# Altium PCB Front panel.PcbDoc
Units mm, origin at the board's own origin, x right, y up, seen from the top; angles counter-clockwise.
Board outline 115.57 x 34.29 mm, 2 copper layers (Top Layer, Bottom Layer); 21 components, 35 nets, 144 pads, 55 vias.
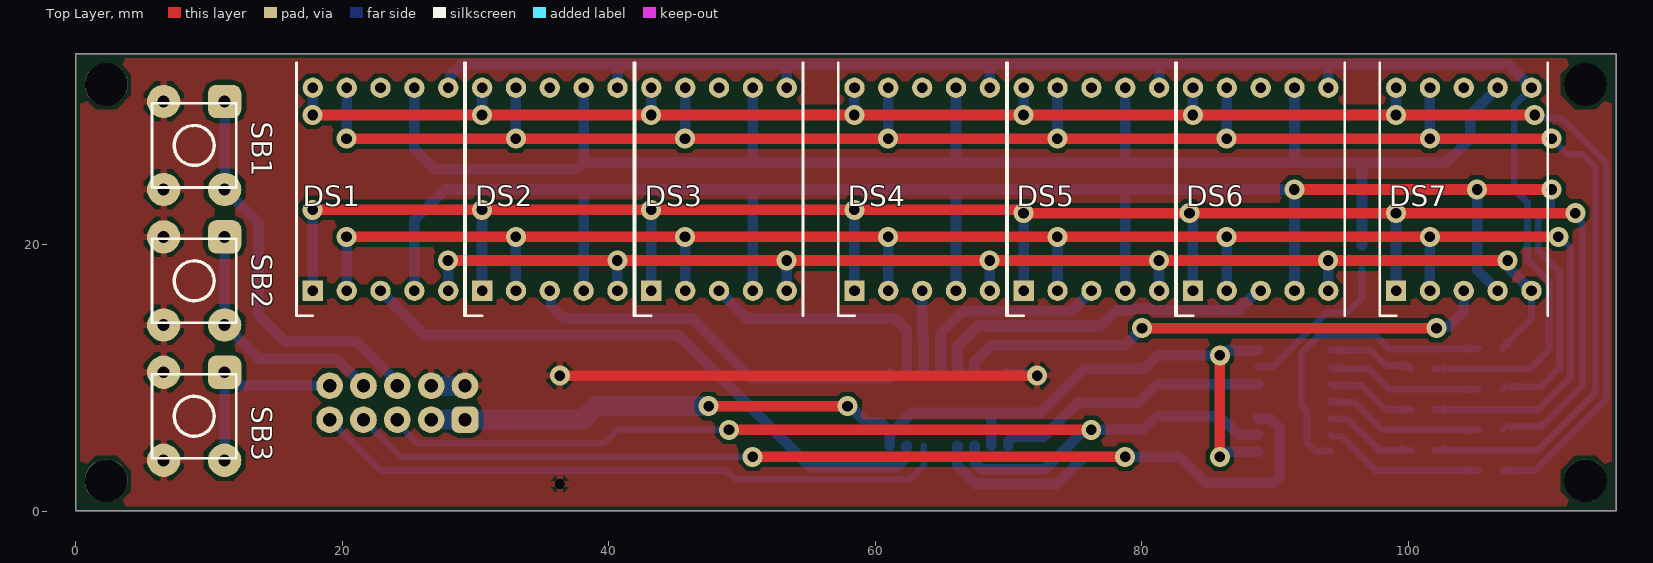
[diagram p0: Top Layer view]
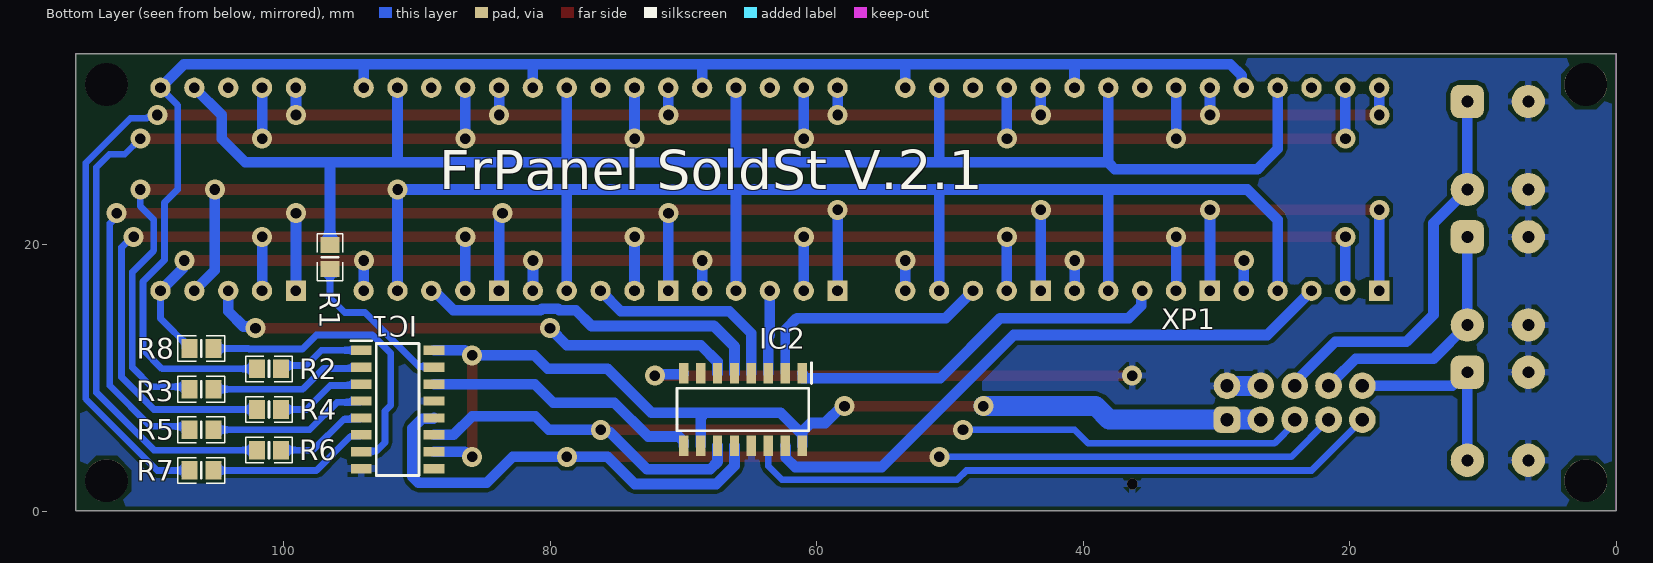
[diagram p1: Bottom Layer view, seen from below]
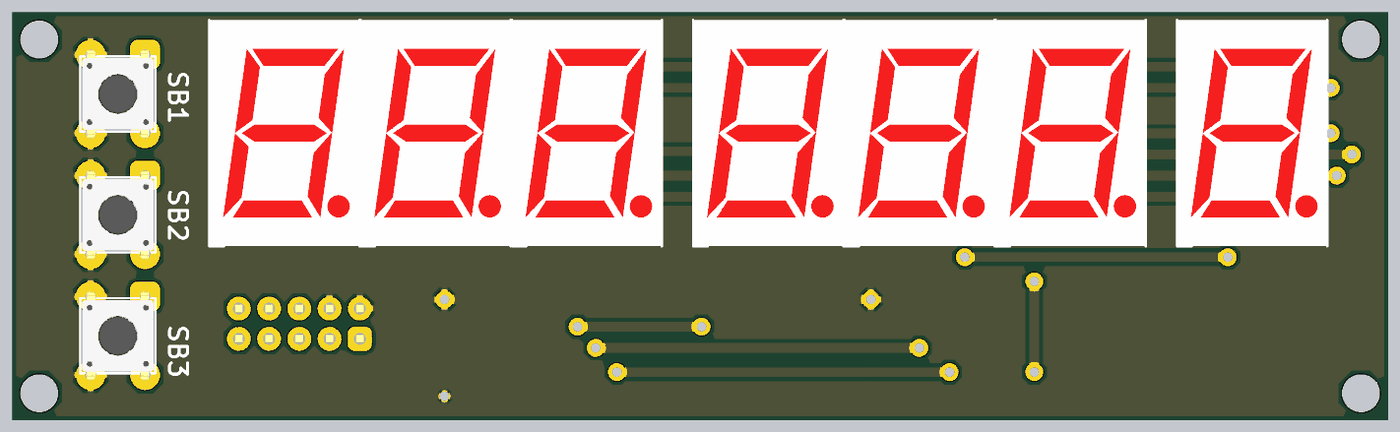
[diagram p2: 3D render of the assembled board from above, using the file's embedded part models]
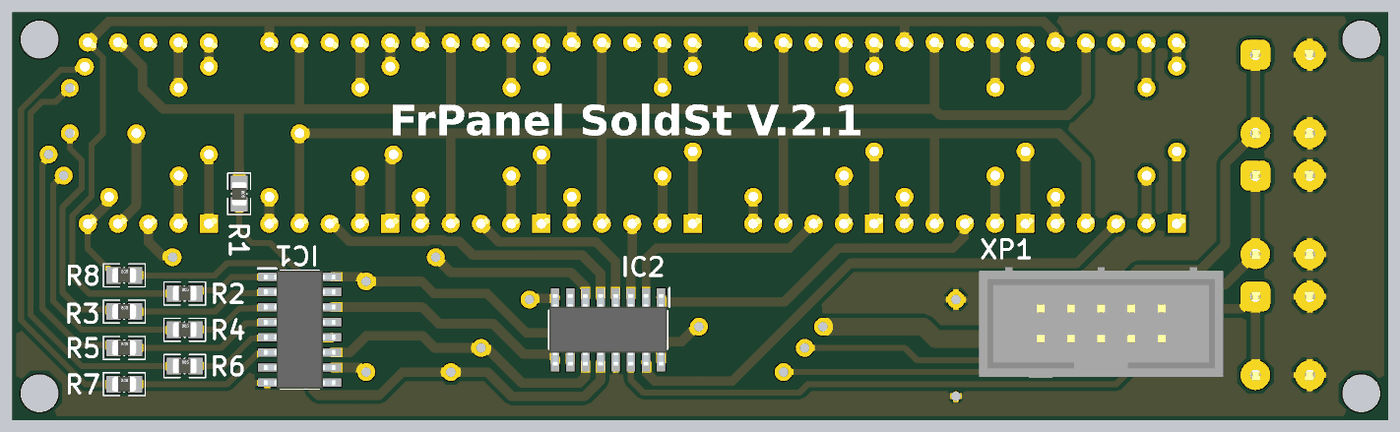
[diagram p3: 3D render of the assembled board from below, using the file's embedded part models]

## Layer stack, top to bottom
Top Solder: solder mask 0.0102, Solder Resist, Dk 3.5
Top Layer: signal copper 0.0356
Dielectric 1: dielectric 0.32, FR-4, Dk 4.8
Bottom Layer: signal copper 0.0356
Bottom Solder: solder mask 0.0102, Solder Resist, Dk 3.5

## Board outline
0.013,0.013 0.013,34.303 115.583,34.303 115.583,0.013

## Design rules (kind name [scope] priority, off if disabled: settings)
Clearance [All] p1: gap=0.3 ignorepadtopadclearanceinfootprint=FALSE
ComponentClearance [All] p1: gap=-0.025 collisioncheckmode=3 verticalgap=0.254 showdistances=FALSE
PlaneConnect [All] p1: planeconnectstyle=Relief reliefexpansion=0.508 reliefentries=4 reliefconductorwidth=0.5 reliefairgap=0.5
PolygonConnect [All] p1: connectstyle=Relief reliefconductorwidth=0.5 reliefentries=4 polygonreliefangle="90 Angle" airgapwidth=0.254
RoutingVias [All] p1: holewidth=0.8 width=1.5 viastyle="Through Hole" minholewidth=0.5 minwidth=1 maxholewidth=1 maxwidth=2
SolderMaskExpansion [All] p1: expansion=0.102 istentingtop=FALSE
Width [All] p1: maxlimit=1.5 minlimit=0.5 preferedwidth=0.8
28 further rules are at their usual default settings.

## Components (designator, comment, footprint, x,y, rotation, side; value= is the part's Value field where it differs from the comment)
DS1 "7-Seg" DIPS1524W51P254L1260H800Q10N 17.793,16.523 r90 top
DS2 "7-Seg" DIPS1524W51P254L1260H800Q10N 30.493,16.523 r90 top
DS3 "7-Seg" DIPS1524W51P254L1260H800Q10N 43.193,16.523 r90 top
DS4 "7-Seg" DIPS1524W51P254L1260H800Q10N 58.433,16.523 r90 top
DS5 "7-Seg" DIPS1524W51P254L1260H800Q10N 71.133,16.523 r90 top
DS6 "7-Seg" DIPS1524W51P254L1260H800Q10N 83.833,16.523 r90 top
DS7 "7-Seg" DIPS1524W51P254L1260H800Q10N 99.073,16.523 r90 top
IC1 "74HC595D" SOIC127P600X175-16N 91.44,7.62 r180 bottom
IC2 "74HC595D" SOIC127P600X175-16N 65.532,7.62 r270 bottom
R1 "100R" RESC2012(0805)N 96.52,19.05 r270 bottom
R2 "100R" RESC2012(0805)N 101.092,10.668 r180 bottom
R3 "100R" RESC2012(0805)N 106.172,9.144 r180 bottom
R4 "100R" RESC2012(0805)N 101.092,7.62 r180 bottom
R5 "100R" RESC2012(0805)N 106.172,6.096 r180 bottom
R6 "100R" RESC2012(0805)N 101.092,4.572 r180 bottom
R7 "100R" RESC2012(0805)N 106.172,3.048 r180 bottom
R8 "100R" RESC2012(0805)N 106.172,12.192 r180 bottom
SB1 "SW-SPST_1" B3FS_SWITCH 8.89,27.432 r270 top
SB2 "SW-SPST_1" B3FS_SWITCH 8.89,17.272 r270 top
SB3 "SW-SPST_1" B3FS_SWITCH 8.89,7.112 r270 top
XP1 "BH-10" BH-10 29.21,6.858 r180 bottom

## Footprints (in the part's own frame and the unit in brackets; to place one, negate y for a bottom-side part, rotate by r counter-clockwise, add the part's x,y. Pads: shape width x height; smd on the part's side, far side on the other; paste and mask are expansions set on the pad)
B3FS_SWITCH [mm] "SWITCH,TACTILE, PUSH BUTTON, MOMENTARY, SPST-NO, VERT, 8.5MM ACTUATOR"
  rrect50% 2.5x2.5 hole 0.9: 1(-3.302,2.286)
  round 2.5 hole 0.9: 2(3.302,2.286) 3(-3.302,-2.286) 4(3.302,-2.286)
  silkscreen extent -3.16,-3.16 3.15,3.15, body extent -3.73,-3 3.73,3, height 8.5
BH-10 [mm]
  rrect50% 2x2 hole 1: 1(0,0)
  round 2 hole 1: 2(0,2.54) 3(2.54,0) 4(2.54,2.54) 5(5.08,0) 6(5.08,2.54) 7(7.62,0) 8(7.62,2.54) 9(10.16,0) 10(10.16,2.54)
  body extent -5.17,-3.28 15.33,6.02, height 9.1
DIPS1524W51P254L1260H800Q10N [mil]
  rect 60x60 hole 31.5: 1(0,0)
  round 60 hole 31.5: 2(0,-100) 3(0,-200) 4(0,-300) 5(0,-400) 6(600,-400) 7(600,-300) 8(600,-200) 9(600,-100) 10(600,0)
  silkscreen extent -74,-448 674,48, body extent -74,-448 674,48, height 358
RESC2012(0805)N [mm] "Chip Resistor, Body 2.0x1.3mm, IPC Medium Density"
  rect 1.2x1.4 smd: 1(-0.9,0) 2(0.9,0)
  silkscreen extent -1.75,-0.97 1.75,0.97, body extent -1,-0.62 1,0.64, height 0.78
SOIC127P600X175-16N [mm]
  rect 1.55x0.7 smd: 1(-2.725,4.445) 2(-2.725,3.175) 3(-2.725,1.905) 4(-2.725,0.635) 5(-2.725,-0.635) 6(-2.725,-1.905) 7(-2.725,-3.175) 8(-2.725,-4.445) 9(2.725,-4.445) 10(2.725,-3.175) 11(2.725,-1.905) 12(2.725,-0.635) 13(2.725,0.635) 14(2.725,1.905) 15(2.725,3.175) 16(2.725,4.445)
  silkscreen extent -3.5,-4.95 1.6,5.15, body extent -3,-4.95 3,4.95, height 1.75

## Part data
DS1 DS2 DS3 DS4 DS5 DS6 DS7: "Display", Manufacturer_Name=Sunrom, Manufacturer_Part_Number=4258, Datasheet Link=https://www.sunrom.com/get/328636, Height=8mm
IC1 IC2: "Integrated Circuit", Manufacturer_Name=NXP, Mouser Part Number=N/A, Datasheet Link=https://assets.nexperia.com/documents/data-sheet/74HC_HCT595.pdf, Height=1.75mm, Manufacturer_Part_Number=74HC595D, Mouser Price/Stock=https://www.mouser.co.uk/ProductDetail/NXP-Semiconductors/74HC595D?qs=KBAwV6Cvgt0f%252BALigJeNTw%3D%3D
R1 R2 R3 R4 R5 R6 R7 R8: library part RESC2012(0805), Package=0805, Part Number=RESC2012(0805)
XP1: library part 302-S101, "Connector Header Through Hole 10 position 0.100\" (2.54mm)", Digi-Key Part Number=ED1543-ND, Package="Header 10POS 2.54mm", HelpURL=https://www.digikey.com/product-detail/en/on-shore-technology-inc/302-S101/ED1543-ND/2178422, Manufacturer Part Number=302-S101, Part Number=302-S101, Price$=0.13125
SB1 SB2 SB3: Part Number=SW-SPST_1

## Free pads (board coordinates)
  round 3.2 hole 3.2 unplated: ""(2.286,2.286) ""(2.286,32.004) ""(113.284,2.286) ""(113.284,32.004)

## Via types
v1: diameter 1.5, hole 0.8, Top Layer to Bottom Layer, 54 vias
v2: diameter 0.8, hole 0.8, Top Layer to Bottom Layer, 1 vias

## Nets (pads, with @x,y where several pads share a name; then routed paths per layer and width w, separated by ;. In a path a pad name is that pad's centre, name@x,y a point inside that pad or via, vN(x,y) a via of type N, cw(c..) or ccw(c..) an arc to the next point about the centre after c; other vN are vias at no path point)
5V: 
A: DS1.7 DS2.7 DS3.7 DS4.7 DS5.7 DS6.7 DS7.7 R1.1 | length 124.4
  Bottom Layer w0.8: DS1.7 25.4,31.75 25.4,27.178 26.416,26.162 26.924,25.654 37.631,25.654 38.1,26.123 38.1,26.162 ; DS2.7 38.113,26.175 38.1,26.162 ; DS3.7 50.813,26.175 50.8,26.162 ; DS4.7 66.053,26.175 66.04,26.162 ; DS5.7 78.74,31.75 78.74,26.162 ; DS6.7 91.453,26.175 91.44,26.162 ; R1.1 96.52,26.162 ; DS7.7 104.648,29.718 104.648,27.94 102.87,26.162 96.52,26.162 ; 38.1,26.162 50.8,26.162 ; 50.8,26.162 66.04,26.162 ; 66.04,26.162 78.74,26.162 ; 78.74,26.162 91.44,26.162 ; 91.44,26.162 96.52,26.162
B: DS1.6 DS2.6 DS3.6 DS4.6 DS5.6 DS6.6 DS7.6 R2.1 | length 122.5
  Bottom Layer w0.5: R2.1 109.113,10.668 110.545,12.1 110.545,17.217 108.928,18.834 108.928,23.152 107.95,24.13 107.95,30.459 109.233,31.742 DS7.6
  Bottom Layer w0.8: DS1.6 28.091,31.901 28.091,32.663 28.956,33.528 40.64,33.528 ; DS2.6 40.653,33.515 40.64,33.528 ; DS3.6 53.353,33.515 53.34,33.528 ; DS4.6 68.593,33.515 68.58,33.528 ; DS5.6 81.293,33.515 81.28,33.528 ; DS6.6 93.993,33.515 93.98,33.528 ; DS7.6 107.468,33.528 93.98,33.528 ; 40.64,33.528 53.34,33.528 ; 53.34,33.528 68.58,33.528 ; 68.58,33.528 81.28,33.528 ; 81.28,33.528 93.98,33.528
C: DS1.4 DS2.4 DS3.4 DS4.4 DS5.4 DS6.4 DS7.4 R3.1 | length 157.3
  Top Layer w0.8: v1(91.44,24.13) v1(105.156,24.13) v1(110.744,24.13)
  Bottom Layer w0.5: R3.1 107.251,9.323 109.907,9.323 111.345,10.761 111.345,17.941 109.728,19.558 109.728,21.844 110.744,22.86 v1(110.744,24.13)
  Bottom Layer w0.8: DS1.4 25.4,16.536 25.4,21.844 27.686,24.13 38.1,24.13 ; DS2.4 38.113,24.117 38.1,24.13 ; DS3.4 50.813,24.117 50.8,24.13 ; DS4.4 66.053,24.117 66.04,24.13 ; DS5.4 78.753,24.117 78.74,24.13 ; DS6.4 91.446,16.529 91.446,24.124 v1(91.44,24.13) 78.74,24.13 ; v1(105.156,24.13) 105.156,18.06 DS7.4 ; 38.1,24.13 50.8,24.13 ; 50.8,24.13 66.04,24.13 ; 66.04,24.13 78.74,24.13
D: DS1.2 DS2.2 DS3.2 DS4.2 DS5.2 DS6.2 DS7.2 R4.1 | length 141.5
  Top Layer w0.8: v1(20.32,20.574) v1(33.02,20.574) v1(45.72,20.574) v1(60.96,20.574) v1(73.66,20.574) v1(86.36,20.574) v1(101.6,20.574) v1(111.252,20.574)
  Bottom Layer w0.5: R4.1 109.728,7.62 112.154,10.046 112.154,19.781 111.361,20.574 v1(111.252,20.574)
  Bottom Layer w0.8: v1(20.32,20.574) 20.326,20.568 20.326,16.529 DS1.2 ; v1(33.02,20.574) 33.026,20.568 33.026,16.529 DS2.2 ; v1(45.72,20.574) 45.726,20.568 45.726,16.529 DS3.2 ; v1(60.96,20.574) 60.966,20.568 60.966,16.529 DS4.2 ; v1(73.66,20.574) 73.666,20.568 73.666,16.529 DS5.2 ; v1(86.36,20.574) 86.366,20.568 86.366,16.529 DS6.2 ; v1(101.6,20.574) 101.606,20.568 101.606,16.529 DS7.2
DIN1: IC2.14 XP1.9 | length 48.4
  Bottom Layer w0.5: XP1.9 22.86,3.048 48.768,3.048 49.464,2.352 62.609,2.352 63.627,3.37 IC2.14
DIN2: IC1.14 IC2.9 | length 20.8
  Bottom Layer w0.8: IC2.9 69.977,5.22 70.345,5.588 72.644,5.588 75.184,8.128 79.756,8.128 81.153,9.525 IC1.14
DP: DS1.5 DS2.5 DS3.5 DS4.5 DS5.5 DS6.5 DS7.5 R8.1 | length 101.4
  Top Layer w0.8: v1(27.94,18.796) v1(40.64,18.796) v1(53.34,18.796) v1(68.58,18.796) v1(81.28,18.796) v1(107.442,18.796)
  Bottom Layer w0.5: R8.1 107.072,12.292 109.233,14.453 DS7.5
  Bottom Layer w0.8: v1(27.94,18.796) 27.946,18.79 27.946,16.529 DS1.5 ; v1(40.64,18.796) 40.646,18.79 40.646,16.529 DS2.5 ; v1(53.34,18.796) 53.346,18.79 53.346,16.529 DS3.5 ; v1(68.58,18.796) 68.586,18.79 68.586,16.529 DS4.5 ; v1(81.28,18.796) 81.286,18.79 81.286,16.529 DS5.5 ; v1(93.98,18.796) 93.986,18.79 93.986,16.529 DS6.5 ; v1(107.442,18.796) 107.576,18.662 107.576,18.18 DS7.5
E: DS1.1 DS2.1 DS3.1 DS4.1 DS5.1 DS6.1 DS7.1 R5.1 | length 157.3
  Top Layer w0.8: v1(17.78,22.606) v1(30.48,22.606) v1(43.18,22.606) 70.677,22.606 70.931,22.352 v1(99.06,22.352) v1(112.522,22.352)
  Bottom Layer w0.5: R5.1 107.326,6.35 109.982,6.35 113.03,9.398 113.03,21.573 112.522,22.081 v1(112.522,22.352)
  Bottom Layer w0.8: v1(17.78,22.606) 17.786,22.6 17.786,16.529 DS1.1 ; v1(30.48,22.606) 30.486,22.6 30.486,16.529 DS2.1 ; v1(43.18,22.606) 43.186,22.6 43.186,16.529 DS3.1 ; v1(58.42,22.606) 58.426,22.6 58.426,16.529 DS4.1 ; v1(71.12,22.352) 71.126,22.346 71.126,16.529 DS5.1 ; v1(83.566,22.352) 83.566,22.163 83.826,21.902 83.826,16.529 DS6.1 ; v1(99.06,22.352) 99.066,22.346 99.066,16.529 DS7.1
F: DS1.9 DS2.9 DS3.9 DS4.9 DS5.9 DS6.9 DS7.9 R6.1 | length 152.2
  Top Layer w0.8: v1(20.32,27.94) v1(33.02,27.94) v1(45.72,27.94) v1(60.96,27.94) v1(73.66,27.94) v1(86.36,27.94) v1(101.6,27.94) v1(110.744,27.94)
  Bottom Layer w0.5: R6.1 109.728,4.572 114.046,8.89 114.046,25.793 113.068,26.771 111.913,26.771 v1(110.744,27.94)
  Bottom Layer w0.8: v1(20.32,27.94) 20.326,27.946 20.326,31.756 DS1.9 ; v1(33.02,27.94) 33.026,27.946 33.026,31.756 DS2.9 ; v1(45.72,27.94) 45.726,27.946 45.726,31.756 DS3.9 ; v1(60.96,27.94) 60.966,27.946 60.966,31.756 DS4.9 ; v1(73.66,27.94) 73.666,27.946 73.666,31.756 DS5.9 ; v1(86.36,27.94) 86.366,27.946 86.366,31.756 DS6.9 ; v1(101.6,27.94) 101.606,27.946 101.606,31.756 DS7.9
G: DS1.10 DS2.10 DS3.10 DS4.10 DS5.10 DS6.10 DS7.10 R7.1 | length 140.6
  Top Layer w0.8: v1(17.78,29.718) v1(30.48,29.718) v1(43.18,29.718) v1(58.42,29.718) v1(71.12,29.718) v1(83.82,29.718) v1(99.06,29.718) v1(109.474,29.718)
  Bottom Layer w0.5: R7.1 109.474,3.048 114.846,8.42 114.846,26.124 111.506,29.464 110.267,29.464 110.204,29.527 109.665,29.527 v1(109.474,29.718)
  Bottom Layer w0.8: v1(17.78,29.718) 17.786,29.724 17.786,31.756 DS1.10 ; v1(30.48,29.718) 30.486,29.724 30.486,31.756 DS2.10 ; v1(43.18,29.718) 43.186,29.724 43.186,31.756 DS3.10 ; v1(58.42,29.718) 58.426,29.724 58.426,31.756 DS4.10 ; v1(71.12,29.718) 71.126,29.724 71.126,31.756 DS5.10 ; v1(83.82,29.718) 83.826,29.724 83.826,31.756 DS6.10 ; v1(99.06,29.718) 99.066,29.724 99.066,31.756 DS7.10
GND: IC1.8 IC1.13 IC2.8 IC2.13 SB1.3 SB1.4 SB2.3 SB2.4 SB3.3 SB3.4 XP1.2 XP1.4 | length 40.6
  Top Layer w0.8: v1(36.322,10.16) v1(72.136,10.16)
  Bottom Layer w0.8: IC2.8 69.977,10.303 70.027,10.253 72.043,10.253 v1(72.136,10.16)
  Bottom Layer w1.5: XP1.4 XP1.2
  other v2: 36.322,2.032
NetDD1_7: 
NetDD1_8: 
NetIC1_1: IC1.1 R2.2 | length 6.6
  Bottom Layer w0.5: IC1.1 97.155,12.065 98.294,10.926 99.934,10.926 R2.2
NetIC1_2: IC1.2 R3.2 | length 11.8
  Bottom Layer w0.5: IC1.2 94.265,10.695 97.001,10.695 98.552,9.144 R3.2
NetIC1_3: IC1.3 R4.2 | length 6.8
  Bottom Layer w0.5: IC1.3 94.265,9.425 96.493,9.425 98.298,7.62 R4.2
NetIC1_4: IC1.4 R5.2 | length 12
  Bottom Layer w0.5: IC1.4 94.265,8.155 95.985,8.155 98.044,6.096 R5.2
NetIC1_5: IC1.5 R6.2 | length 7
  Bottom Layer w0.5: IC1.5 94.265,6.885 95.477,6.885 97.79,4.572 99.06,4.572 R6.2
NetIC1_6: IC1.6 R7.2 | length 12.2
  Bottom Layer w0.5: IC1.6 94.265,5.615 94.969,5.615 97.536,3.048 R7.2
NetIC1_7: IC1.7 R8.2 | length 23.3
  Bottom Layer w0.5: IC1.7 94.109,4.501 93.035,4.501 92.39,5.146 92.39,7.506 91.948,7.948 91.948,11.823 93.333,13.208 97.536,13.208 98.582,12.162 102.596,12.162 102.626,12.192 R8.2
NetIC1_15: IC1.15 R1.2 | length 12.1
  Bottom Layer w0.5: IC1.15 88.771,10.851 89.845,10.851 93.887,14.893 95.411,14.893 96.52,16.002 R1.2
NetSB1_1: SB1.1 SB1.2 XP1.6 | length 29.8
  Bottom Layer w0.8: SB1.1 SB1.2 13.716,21.59 13.716,14.732 15.748,12.7 21.082,12.7 24.13,9.652 XP1.6
NetSB2_1: SB2.1 SB2.2 XP1.8 | length 19.4
  Bottom Layer w0.8: SB2.1 SB2.2 13.716,11.43 19.558,11.43 21.198,9.79 21.435,9.79 21.59,9.945 21.59,9.79 XP1.8
NetSB3_1: SB3.1 SB3.2 XP1.10 | length 14.9
  Bottom Layer w0.8: SB3.2 SB3.1 11.298,10.414 12.314,9.398 XP1.10
S1: DS1.3 IC2.15 | length 46.1
  Bottom Layer w0.8: DS1.3 26.188,13.208 45.212,13.208 55.118,3.302 61.609,3.302 62.307,4 62.307,4.845 IC2.15
S2: DS2.3 IC2.1 | length 29.2
  Bottom Layer w0.8: DS2.3 35.639,16.456 35.639,15.415 36.576,14.478 46.228,14.478 50.736,9.97 61.037,9.97 61.037,10.295 IC2.1
S3: DS3.3 IC2.2 | length 18.5
  Bottom Layer w0.7: IC2.2 62.357,13.589
  Bottom Layer w0.8: DS3.3 50.318,14.478 61.468,14.478 62.357,13.589
S4: DS4.3 IC2.3 | length 6.2
  Bottom Layer w0.8: DS4.3 63.513,13.208 63.627,13.094 IC2.3
S5: DS5.3 IC2.4 | length 15.6
  Bottom Layer w0.8: IC2.4 64.897,13.335 66.561,14.999 74.689,14.999 DS5.3
S6: DS6.3 IC2.5 | length 26.6
  Bottom Layer w0.8: IC2.5 66.167,12.349 67.702,13.884 76.89,13.884 78.067,15.061 79.304,15.061 79.409,15.166 80.611,15.166 80.716,15.061 87.255,15.061 88.717,16.523 DS6.3
S7: DS7.3 IC2.6 | length 40.7
  Top Layer w0.8: v1(80.01,13.716) v1(102.108,13.716)
  Bottom Layer w0.8: IC2.6 67.437,11.19 68.693,12.446 78.74,12.446 v1(80.01,13.716) ; v1(102.108,13.716) 102.242,13.85 103.004,13.85 104.153,14.999 DS7.3
SHCP: IC1.11 IC2.11 XP1.5 | length 78.5
  Top Layer w0.8: v1(49.022,6.096) v1(76.2,6.096)
  Bottom Layer w0.5: XP1.5 24.13,6.604 25.654,5.08 39.624,5.08 40.64,6.096 v1(49.022,6.096)
  Bottom Layer w0.8: IC2.11 67.437,3.683 67.988,3.132 72.728,3.132 75.558,5.962 76.066,5.962 v1(76.2,6.096) ; v1@76.011,6.096 80.105,6.096 81.121,7.112 85.852,7.112 87.249,5.715 IC1.11
STCP: IC1.12 IC2.12 XP1.7 | length 91.9
  Top Layer w0.8: v1(50.8,4.064) v1(78.74,4.064)
  Bottom Layer w0.5: XP1.7 24.384,4.064 v1(50.8,4.064)
  Bottom Layer w0.8: IC2.12 66.167,3.397 67.532,2.032 73.66,2.032 75.692,4.064 v1(78.74,4.064) 82.804,4.064 84.743,2.125 89.871,2.125 90.34,2.594 90.34,6.205 89.61,6.935 88.765,6.935 IC1.12
VDD: IC1.10 IC1.16 IC2.10 IC2.16 XP1.1 XP1.3 | length 78.7
  Top Layer w0.8: v1(47.498,7.874) v1(57.912,7.874) ; v1(85.852,4.064) v1(85.852,11.684)
  Bottom Layer w0.8: v1(57.912,7.874) 58.101,7.874 59.367,6.609 60.447,6.609 61.087,5.969 IC2.16 ; 61.087,5.74 62.713,7.366 68.58,7.366 68.707,7.366 72.39,7.366 75.692,10.668 80.169,10.668 81.185,11.684 v1@86.041,11.684 ; 68.664,7.196 68.58,7.112 68.707,6.985 IC2.10 ; v1@86.422,4.445 IC1.10 ; v1@86.422,12.065 IC1.16
  Bottom Layer w1.5: XP1.3 XP1.1 38.047,6.858 39.063,7.874 v1(47.498,7.874)
pads on no net: DS1.8 DS2.8 DS3.8 DS4.8 DS5.8 DS6.8 DS7.8 IC1.9 IC2.7

## Polygon pours and split planes (outlines as drawn)
GND on Bottom Layer "GND" (solid, remove dead copper, pour order 0): 0,34.534 115.57,34.534 115.57,0.244 0,0.244
GND on Top Layer "GND" (solid, remove dead copper, pour order 1): 0,34.29 115.57,34.29 115.57,0 0,0

## Keep-outs
Keep-Out Layer:
  lines w0.025: 0.013,0.013 0.013,34.303 115.583,34.303 115.583,0.013 0.013,0.013 ; 0.013,0.013 0.013,0.013

## Silkscreen, mask and mechanical layers (free items; w line width, h text height)
Bottom Overlay:
  text "FrPanel SoldSt V.2.1" at 88.326,23.178 h5